# Altium PCB Brightside_Telemetry_pcb_rev2.PcbDoc (part 2 of 2)
Units mm, origin at the board's own origin, x right, y up, seen from the top; angles counter-clockwise.
Board outline 99.99 x 89.99 mm, 2 copper layers (Top Layer, Bottom Layer); 84 components, 55 nets, 357 pads, 109 vias.
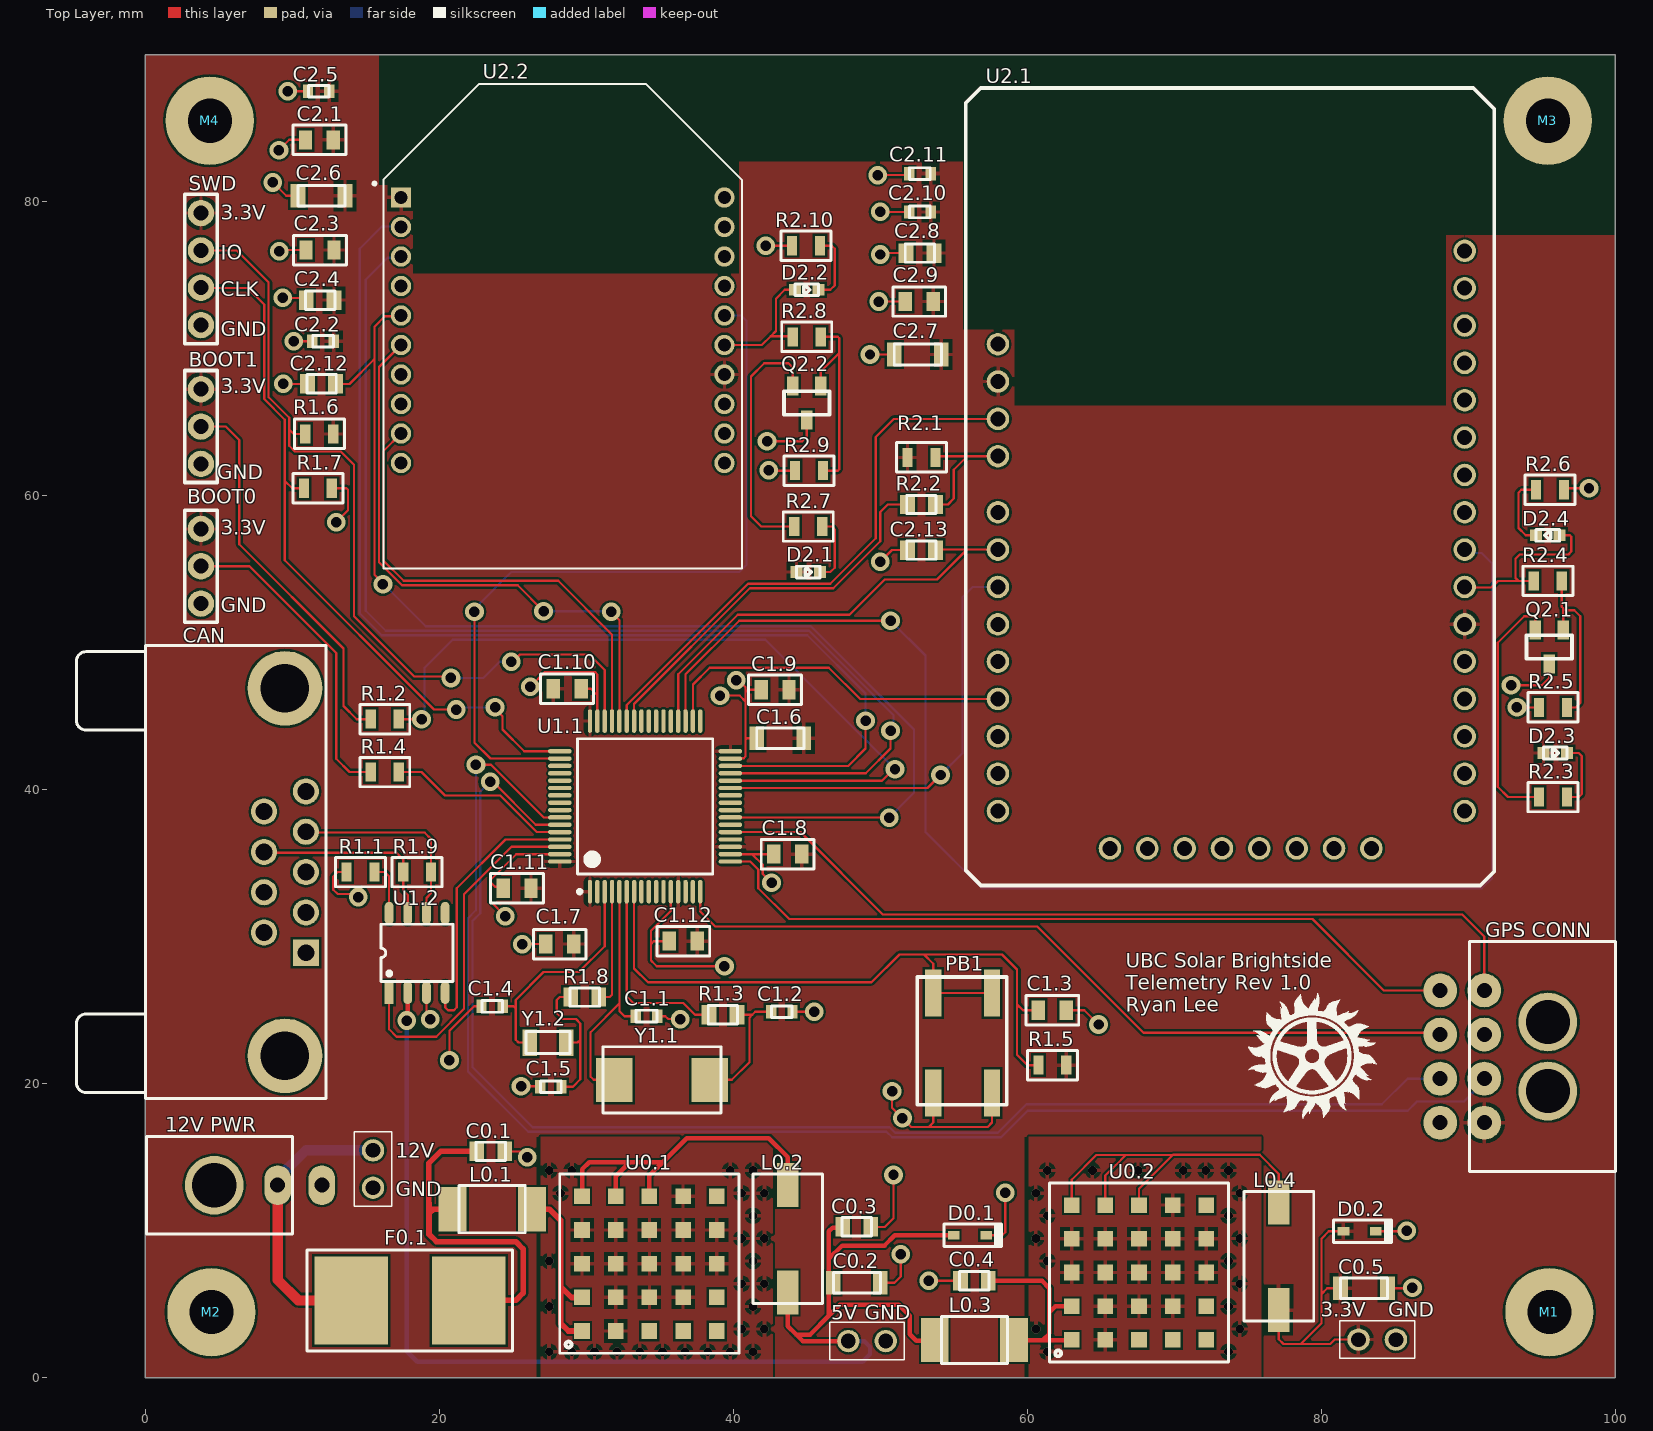
[diagram p0: Top Layer view]

## Part data (continued)
L0.1 L0.3: library part 742792510, "WURTH ELEKTRONIK - 742792510 - FERRITE BEAD, 70R, 6A, 1812", Case Code (Imperial)=1812, Case Code (Metric)=4532, Case/Package=SMD/SMT, Current Rating=6A, DC Resistance (DCR)=30mR, Manufacturer="Wurth Electronics", Max DC Current=3mA, Max Operating Temperature=125°C, Min Operating Temperature=-55°C, Package Quantity=1, Supplier Part Number 1=732-1640-1-ND, Test Frequency=100MHz, Tolerance=25%, Category="Ferrite Beads and Chips", ComponentLink1Description=https://datasheet.ciiva.com/1475/1695992-1475250.pdf?src-supplier=Farnell, ComponentLink1URL=https://datasheet.ciiva.com/1475/1695992-1475250.pdf?src-supplier=Farnell, ComponentLink2Description=https://datasheet.ciiva.com/11803/0900766b80bbd134-11803157.pdf?src-supplier=RSComponents, ComponentLink2URL=https://datasheet.ciiva.com/11803/0900766b80bbd134-11803157.pdf?src-supplier=RSComponents, ComponentLink3Description=https://datasheet.ciiva.com/23762/742792510-23762981.pdf?src-supplier=Newark, ComponentLink3URL=https://datasheet.ciiva.com/23762/742792510-23762981.pdf?src-supplier=Newark, ComponentLink4Description=https://datasheet.ciiva.com/4940/742792510-72179-4940456.pdf?src-supplier=Mouser, ComponentLink4URL=https://datasheet.ciiva.com/4940/742792510-72179-4940456.pdf?src-supplier=Mouser, ComponentLink5Description=https://datasheet.ciiva.com/1013/742792510-1013644.pdf?src-supplier=Digi-Key, ComponentLink5URL=https://datasheet.ciiva.com/1013/742792510-1013644.pdf?src-supplier=Digi-Key, ComponentLink6Description=https://datasheet.ciiva.com/1013/742792510-1013645.pdf?src-supplier=Digi-Key, ComponentLink6URL=https://datasheet.ciiva.com/1013/742792510-1013645.pdf?src-supplier=Digi-Key, ComponentLink7Description=https://datasheet.ciiva.com/1126/1695992-1126824.pdf?src-supplier=Element14, ComponentLink7URL=https://datasheet.ciiva.com/1126/1695992-1126824.pdf?src-supplier=Element14, ComponentLink8Description=https://datasheet.ciiva.com/1013/742792510-1013646.pdf?src-supplier=Digi-Key, ComponentLink8URL=https://datasheet.ciiva.com/1013/742792510-1013646.pdf?src-supplier=Digi-Key, Depth=3.2mm, Height=1.5mm, Impedance=70R, Lead Free="Lead Free", Length=4.5mm, Manufacturer Part Number=742792510, Material=Ferrite, Max Current Rating=6A, Mount="Surface Mount", Number of Lines=1, Packaging="Tape and Reel", REACH SVHC=Unknown, Resistance=30mR, RoHS=Yes, Stock 1=5974, Supplier 1=Digi-Key, Termination=SMD/SMT, Weight=0.003951oz, Width=3.2mm
L0.2 L0.4: library part 7427932, "Ferrite Bead 98 Ohm 2SMD 1LN", Case Code (Imperial)=1812, Case Code (Metric)=4532, Case/Package=SMD/SMT, DC Resistance (DCR)=0.9mR, Manufacturer="Wurth Electronics", Max Current Rating=6A, Max Operating Temperature=125°C, Min Operating Temperature=-55°C, Package Quantity=1, Supplier Part Number 1=732-2394-1-ND, Test Frequency=100MHz, Tolerance=25%, Category="Ferrite Beads and Chips", ComponentLink1Description=https://datasheet.ciiva.com/1014/7427932-1014097.pdf?src-supplier=Digi-Key, ComponentLink1URL=https://datasheet.ciiva.com/1014/7427932-1014097.pdf?src-supplier=Digi-Key, ComponentLink2Description=https://datasheet.ciiva.com/1466/1696119-1466626.pdf?src-supplier=Element14, ComponentLink2URL=https://datasheet.ciiva.com/1466/1696119-1466626.pdf?src-supplier=Element14, ComponentLink3Description=https://datasheet.ciiva.com/11796/0900766b80f886b0-11796146.pdf?src-supplier=RSComponents, ComponentLink3URL=https://datasheet.ciiva.com/11796/0900766b80f886b0-11796146.pdf?src-supplier=RSComponents, ComponentLink4Description=https://datasheet.ciiva.com/23763/7427932-23763047.pdf?src-supplier=Newark, ComponentLink4URL=https://datasheet.ciiva.com/23763/7427932-23763047.pdf?src-supplier=Newark, ComponentLink5Description=https://datasheet.ciiva.com/4939/7427932-72413-4939403.pdf?src-supplier=Mouser, ComponentLink5URL=https://datasheet.ciiva.com/4939/7427932-72413-4939403.pdf?src-supplier=Mouser, ComponentLink6Description=https://datasheet.ciiva.com/1014/7427932-1014098.pdf?src-supplier=Digi-Key, ComponentLink6URL=https://datasheet.ciiva.com/1014/7427932-1014098.pdf?src-supplier=Digi-Key, ComponentLink7Description=https://datasheet.ciiva.com/1014/7427932-1014099.pdf?src-supplier=Digi-Key, ComponentLink7URL=https://datasheet.ciiva.com/1014/7427932-1014099.pdf?src-supplier=Digi-Key, ComponentLink8Description=https://datasheet.ciiva.com/22711/1696119-22711445.pdf?src-supplier=Element14, ComponentLink8URL=https://datasheet.ciiva.com/22711/1696119-22711445.pdf?src-supplier=Element14, Depth=4.75mm, Height=3mm, Impedance=98R, Length=7.8mm, Manufacturer Part Number=7427932, Max DC Current=6A, Mount="Surface Mount", Number of Lines=1, Packaging="Tape and Reel", REACH SVHC=Unknown, RoHS=Yes, Shielding=Unshielded, Stock 1=698, Supplier 1=Digi-Key, Termination=SMD/SMT, Width=0.187inch
PB1: "SWITCH TACTILE SPST-NO 0.02A 15V", Case/Package=SMD/SMT, Color=White, Contact Current Rating=20mA, Contact Resistance=100mR, Manufacturer 1=Panasonic, Manufacturer Part Number 1=EVQ-Q2Y03W, Max Operating Temperature=85°C, Max Voltage Rating (DC)=15V, Min Operating Temperature=-40°C, Operating Force=3.5N, Package Quantity=1, Supplier Part Number 1=P12961SDKR-ND, Voltage Rating (AC)=250V, Actuator Length=1.3mm, Actuator Type=Standard, ComponentLink1Description=https://datasheet.ciiva.com/25603/0900766b810ad3e5-25603840.pdf?src-supplier=RSComponents, ComponentLink1URL=https://datasheet.ciiva.com/25603/0900766b810ad3e5-25603840.pdf?src-supplier=RSComponents, ComponentLink2Description=https://datasheet.ciiva.com/2901/atk0000ce28-2901284.pdf?src-supplier=Digi-Key, ComponentLink2URL=https://datasheet.ciiva.com/2901/atk0000ce28-2901284.pdf?src-supplier=Digi-Key, ComponentLink3Description=https://datasheet.ciiva.com/2901/atk0000ce28-2901285.pdf?src-supplier=Digi-Key, ComponentLink3URL=https://datasheet.ciiva.com/2901/atk0000ce28-2901285.pdf?src-supplier=Digi-Key, ComponentLink4Description=https://datasheet.ciiva.com/2901/atk0000ce28-2901286.pdf?src-supplier=Digi-Key, ComponentLink4URL=https://datasheet.ciiva.com/2901/atk0000ce28-2901286.pdf?src-supplier=Digi-Key, ComponentLink5Description=https://datasheet.ciiva.com/30127/8atk0000ce28-30127814.pdf?src-supplier=Onlinecomponents.com, ComponentLink5URL=https://datasheet.ciiva.com/30127/8atk0000ce28-30127814.pdf?src-supplier=Onlinecomponents.com, ComponentLink6Description=https://datasheet.ciiva.com/8165/atk0000ce28-8165191.pdf?src-supplier=Avnet, ComponentLink6URL=https://datasheet.ciiva.com/8165/atk0000ce28-8165191.pdf?src-supplier=Avnet, ComponentLink7Description=https://datasheet.ciiva.com/17099/70270561-17099386.pdf?src-supplier=Allied+Electronics, ComponentLink7URL=https://datasheet.ciiva.com/17099/70270561-17099386.pdf?src-supplier=Allied+Electronics, ComponentLink8Description=https://datasheet.ciiva.com/5685/28111-5685339.pdf?src-supplier=Farnell, ComponentLink8URL=https://datasheet.ciiva.com/5685/28111-5685339.pdf?src-supplier=Farnell, ComponentLink9Description=https://datasheet.ciiva.com/16438/atk0000ce28-16438079.pdf?src-supplier=Future+Electronics, ComponentLink9URL=https://datasheet.ciiva.com/16438/atk0000ce28-16438079.pdf?src-supplier=Future+Electronics, Current Rating=20mA, Depth=6.6mm, Electrical Life=100000Cycles, Height=3.1mm, Illumination Type=Non-Illuminated,Illuminated, Lead Free="Lead Free", Length=6mm, Max Current Rating=20mA, Mechanical Life=100000Cycles, Mount="Surface Mount", Number of Poles=1, Orientation=Straight, Packaging="Tape and Reel", Pricing 1="1=0.30000, 10=0.28600, 25=0.27520, 50=0.26520, 100=0.25490, 250=0.23452, 500=0.20394, 1000=0.17335 (USD)", Radiation Hardening=No, REACH SVHC=Unknown, RoHS=Yes, Stock 1=209620, Supplier 1=Digi-Key, Switch Function=Off-Mom, Switch Travel=0.25mm, Termination=SMD/SMT, Thickness=1.8mm, Throw Configuration=SPST, Voltage Rating (DC)=15V, Width=6mm
Q2.1 Q2.2: library part MMBT3904LT1G, "Transistor, Bipolar, Si, NPN, General Purpose, VCEO 40VDC, IC 200mA, PD 225mW, SOT-23", Case/Package=SOT-23-3, Collector Base Voltage (VCBO)=60V, Collector Emitter Breakdown Voltage=40V, Collector Emitter Saturation Voltage=300mV, Current Rating=200mA, Emitter Base Voltage (VEBO)=6V, Frequency=300MHz, Manufacturer="ON Semiconductor", Max Operating Temperature=150°C, Max Power Dissipation=300mW, Min Operating Temperature=-55°C, Package Quantity=1, Supplier Part Number 1=MMBT3904LT1GOSCT-ND, Category=BJTs, Collector Emitter Voltage (VCEO)=40V, ComponentLink1Description=https://datasheet.ciiva.com/16199/mmbt3904lt1-d-16199009.pdf?src-supplier=Future+Electronics, ComponentLink1URL=https://datasheet.ciiva.com/16199/mmbt3904lt1-d-16199009.pdf?src-supplier=Future+Electronics, ComponentLink2Description=https://datasheet.ciiva.com/4723/mmbt3904lt1-d-113169-4723050.pdf?src-supplier=Mouser, ComponentLink2URL=https://datasheet.ciiva.com/4723/mmbt3904lt1-d-113169-4723050.pdf?src-supplier=Mouser, ComponentLink3Description=https://datasheet.ciiva.com/15138/getdatasheetpartid-53263-15138779.pdf?src-supplier=Verical, ComponentLink3URL=https://datasheet.ciiva.com/15138/getdatasheetpartid-53263-15138779.pdf?src-supplier=Verical, ComponentLink4Description=https://datasheet.ciiva.com/11199/mmbt3904lt1-d-11199003.pdf?src-supplier=Avnet, ComponentLink4URL=https://datasheet.ciiva.com/11199/mmbt3904lt1-d-11199003.pdf?src-supplier=Avnet, ComponentLink5Description=https://datasheet.ciiva.com/976/mmbt3904lt1-d-976364.pdf?src-supplier=Digi-Key, ComponentLink5URL=https://datasheet.ciiva.com/976/mmbt3904lt1-d-976364.pdf?src-supplier=Digi-Key, ComponentLink6Description=https://datasheet.ciiva.com/14546/70099530-14546188.pdf?src-supplier=Allied+Electronics, ComponentLink6URL=https://datasheet.ciiva.com/14546/70099530-14546188.pdf?src-supplier=Allied+Electronics, ComponentLink7Description=https://datasheet.ciiva.com/7972/1708269-7972381.pdf?src-supplier=Element14, ComponentLink7URL=https://datasheet.ciiva.com/7972/1708269-7972381.pdf?src-supplier=Element14, ComponentLink8Description=https://datasheet.ciiva.com/22664/1708269-22664159.pdf?src-supplier=Element14, ComponentLink8URL=https://datasheet.ciiva.com/22664/1708269-22664159.pdf?src-supplier=Element14, ComponentLink9Description=https://datasheet.ciiva.com/976/mmbt3904lt1-d-976362.pdf?src-supplier=Digi-Key, ComponentLink9URL=https://datasheet.ciiva.com/976/mmbt3904lt1-d-976362.pdf?src-supplier=Digi-Key, ComponentLink10Description=https://datasheet.ciiva.com/16478/mmbt3904lt1-d-16478538.pdf?src-supplier=Avnet+Asia, ComponentLink10URL=https://datasheet.ciiva.com/16478/mmbt3904lt1-d-16478538.pdf?src-supplier=Avnet+Asia, ComponentLink11Description=https://datasheet.ciiva.com/976/mmbt3904lt1-d-976363.pdf?src-supplier=Digi-Key, ComponentLink11URL=https://datasheet.ciiva.com/976/mmbt3904lt1-d-976363.pdf?src-supplier=Digi-Key, Contact Plating=Tin,Matte, Element Configuration=Single, Gain Bandwidth Product=300MHz, Height=0.94mm, hFE Min=100, Lead Free="Lead Free", Length=2.9mm, Manufacturer Part Number=MMBT3904LT1G, Max Breakdown Voltage=40V, Max Collector Current=200mA, Max Frequency=300MHz, Number of Elements=1, Number of Pins=3, Packaging="Tape and Reel", Polarity=NPN, Power Dissipation=300mW, Pricing 1="1=0.12000, 10=0.11200, 25=0.10640, 100=0.04680, 250=0.04488, 500=0.03672, 1000=0.02550 (USD)", Radiation Hardening=No, REACH SVHC="No SVHC", RoHS=Yes, Stock 1=1679516, Supplier 1=Digi-Key, Transition Frequency=300MHz, Type="General Purpose", Voltage Rating (DC)=40V, Width=1.3mm
R1.1 R2.1 R2.6 R2.10: library part ERJ6ENF1001V, "RES SMD 1K OHM 1% 1/8W 0805", Case Code (Imperial)=0805, Case Code (Metric)=2012, Manufacturer=Panasonic, Max Operating Temperature=155°C, Max Power Dissipation=125mW, Min Operating Temperature=-55°C, Package Quantity=1, Resistance=1kR, Supplier Part Number 1=P1.00KCCT-ND, Temperature Coefficient=100ppm/°C, Tolerance=1%, Voltage Rating=150V, Case/Package=0805, Category=Resistors, ComponentLink1Description=https://datasheet.ciiva.com/34303/1988962-34303619.pdf?src-supplier=Jameco, ComponentLink1URL=https://datasheet.ciiva.com/34303/1988962-34303619.pdf?src-supplier=Jameco, ComponentLink2Description=https://datasheet.ciiva.com/11808/0900766b80f80784-11808500.pdf?src-supplier=RSComponents, ComponentLink2URL=https://datasheet.ciiva.com/11808/0900766b80f80784-11808500.pdf?src-supplier=RSComponents, ComponentLink3Description=https://datasheet.ciiva.com/28532/426256-28532134.pdf?src-supplier=Element14, ComponentLink3URL=https://datasheet.ciiva.com/28532/426256-28532134.pdf?src-supplier=Element14, ComponentLink4Description=https://datasheet.ciiva.com/30051/aoa0000ce2-30051974.pdf?src-supplier=Onlinecomponents.com, ComponentLink4URL=https://datasheet.ciiva.com/30051/aoa0000ce2-30051974.pdf?src-supplier=Onlinecomponents.com, ComponentLink5Description=https://datasheet.ciiva.com/16774/70260748-16774249.pdf?src-supplier=Allied+Electronics, ComponentLink5URL=https://datasheet.ciiva.com/16774/70260748-16774249.pdf?src-supplier=Allied+Electronics, ComponentLink6Description=https://datasheet.ciiva.com/46373/1678782-46373337.pdf?src-supplier=Element14, ComponentLink6URL=https://datasheet.ciiva.com/46373/1678782-46373337.pdf?src-supplier=Element14, ComponentLink7Description=https://datasheet.ciiva.com/46373/1678782-46373338.pdf?src-supplier=Element14, ComponentLink7URL=https://datasheet.ciiva.com/46373/1678782-46373338.pdf?src-supplier=Element14, ComponentLink8Description=https://datasheet.ciiva.com/48532/aoa0000ce2-48532156.pdf?src-supplier=Avnet, ComponentLink8URL=https://datasheet.ciiva.com/48532/aoa0000ce2-48532156.pdf?src-supplier=Avnet, ComponentLink9Description=https://datasheet.ciiva.com/7942/426256-7942429.pdf?src-supplier=Element14, ComponentLink9URL=https://datasheet.ciiva.com/7942/426256-7942429.pdf?src-supplier=Element14, ComponentLink10Description=https://datasheet.ciiva.com/16199/aoa0000ce2-16199262.pdf?src-supplier=Future+Electronics, ComponentLink10URL=https://datasheet.ciiva.com/16199/aoa0000ce2-16199262.pdf?src-supplier=Future+Electronics, ComponentLink11Description=https://datasheet.ciiva.com/9117/aoa0000ce2-9117391.pdf?src-supplier=Avnet, ComponentLink11URL=https://datasheet.ciiva.com/9117/aoa0000ce2-9117391.pdf?src-supplier=Avnet, ComponentLink12Description=https://datasheet.ciiva.com/16523/aoa0000ce2-16523855.pdf?src-supplier=Avnet+Asia, ComponentLink12URL=https://datasheet.ciiva.com/16523/aoa0000ce2-16523855.pdf?src-supplier=Avnet+Asia, Composition="Thick Film", Contact Plating=Tin, Depth=1.25mm, Features="Automotive AEC-Q200", Height=0.6mm, Lead Free="Lead Free", Length=2mm, Manufacturer Part Number=ERJ6ENF1001V, Military Standard=Not, Mount="Surface Mount", Number of Pins=2, Number of Terminations=2, Packaging="Tape and Reel", Power Rating=125mW, Pricing 1="1 = 0.100000, 10 = 0.081000, 100 = 0.031100, 1000 = 0.013670, 2500 = 0.011810 (USD)", Radiation Hardening=No, REACH SVHC="No SVHC", RoHS=Yes, Stock 1=946321, Supplier 1=Digi-Key, Termination=SMD/SMT, Voltage Rating (DC)=150V, Width=0.049inch
R1.2 R1.4 R1.5 R1.6 R1.7 R2.4 R2.5 R2.8 R2.9: library part ERJ6ENF1002V, "RES SMD 10K OHM 1% 1/8W 0805", Case/Package=0805, Manufacturer=Yageo, Manufacturer Part Number=ERJ-6ENF1002V, Max Operating Temperature=155°C, Min Operating Temperature=-55°C, Power Rating=125mW, Resistance=10000R, Supplier Part Number 1=P10.0KCCT-ND, Temperature Coefficient=100ppm/°C, Tolerance=1%, Voltage Rating (DC)=150V, Category=Resistors, ComponentLink1Description=https://datasheet.ciiva.com/27056/2078477-27056611.pdf?src-supplier=Jameco, ComponentLink1URL=https://datasheet.ciiva.com/27056/2078477-27056611.pdf?src-supplier=Jameco, Depth=1.25mm, Height=0.5mm, Lead Free="Lead Free", Length=2mm, Mount="Surface Mount", Number of Pins=2, Packaging="Tape and Reel", Pricing 1="1 = 0.100000, 10 = 0.081000, 100 = 0.031100, 1000 = 0.013670, 2500 = 0.011810 (USD)", REACH SVHC="No SVHC", RoHS=No, Stock 1=3342401, Supplier 1=Digi-Key, Width=1.25mm
R1.3 R1.8 R2.2: library part RMCF0805ZT0R00, "STACKPOLE ELECTRONICS - RMCF0805ZT0R00. - RES THKFLM 0805 0 OHM JUMPER 1/8W 200PPM/ C SMD ROHS COMPLIANT: YES", Case Code (Imperial)=0805, Case Code (Metric)=2012, Manufacturer="Stackpole Electronics", Max Operating Temperature=155°C, Max Power Dissipation=125mW, Min Operating Temperature=-55°C, Resistance=0mR, Supplier Part Number 1=RMCF0805ZT0R00CT-ND, Case/Package=0805, Category="Chip SMD Resistors", ComponentLink1Description=https://datasheet.ciiva.com/15193/getdatasheetpartid-360417-15193658.pdf?src-supplier=Verical, ComponentLink1URL=https://datasheet.ciiva.com/15193/getdatasheetpartid-360417-15193658.pdf?src-supplier=Verical, Composition="Thick Film", Contact Plating=Tin,Matte, Depth=1.25mm, Features="Automotive AEC-Q200", Height=0.026inch, Lead Free="Lead Free", Length=2mm, Manufacturer Part Number=RMCF0805ZT0R00, Military Standard=Not, Mount="Surface Mount", Number of Terminations=2, Packaging="Tape and Reel", Power Rating=125mW, Radiation Hardening=No, RoHS=Yes, Stock 1=14305, Supplier 1=Digi-Key, Width=0.049inch
R1.9: library part ERJ6ENV1200V, "RES SMD 120 OHM 1% 1/8W 0805", Supplier Part Number 1=P120CCT-ND, ComponentLink1Description=https://datasheet.ciiva.com/11821/0900766b80f80784-11821533.pdf?src-supplier=RSComponents, ComponentLink1URL=https://datasheet.ciiva.com/11821/0900766b80f80784-11821533.pdf?src-supplier=RSComponents, Supplier 1=Digi-Key
R2.3 R2.7: library part ERJ6ENF4640V, "RES SMD 464 OHM 1% 1/8W 0805", Supplier Part Number 1=P464CCT-ND, Supplier 1=Digi-Key
SWD: library part "0.1\" Header 4pos"
U0.1: "DC-DC Converter; SMD; reg; Single Output; 3A; 5V Out; RPM-3.0 Series", Manufacturer=Recom, Supplier Part Number 1=945-3254-1-ND, Category="Voltage Regulators - Switching", ComponentLink1Description=http://www.farnell.com/datasheets/2787803.pdf?src-supplier=Farnell, ComponentLink1URL=http://www.farnell.com/datasheets/2787803.pdf?src-supplier=Farnell, ComponentLink2Description=https://www.recom-power.com/pdf/Innoline/RPM-3.0.pdf?src-supplier=Digi-Key, ComponentLink2URL=https://www.recom-power.com/pdf/Innoline/RPM-3.0.pdf?src-supplier=Digi-Key, Manufacturer Part Number=RPM5.0-3.0, Pricing 1="1=4.26000 (USD)", RoHS=No, Stock 1=929, Supplier 1=Digi-Key
U0.2: "RPM-3.0 Series 3 to 17 V Input 3.3 V Output 3 A Non Isolated DC/DC Converter", Manufacturer=Recom, Supplier Part Number 1=945-3253-1-ND, Category="Voltage Regulators - Switching", ComponentLink1Description=https://www.recom-power.com/pdf/Innoline/RPM-3.0.pdf?src-supplier=Digi-Key, ComponentLink1URL=https://www.recom-power.com/pdf/Innoline/RPM-3.0.pdf?src-supplier=Digi-Key, Manufacturer Part Number=RPM3.3-3.0, Pricing 1="1=4.26000 (USD)", RoHS=No, Stock 1=287, Supplier 1=Digi-Key
U1.1: "ARM® Cortex®-M3 STM32F1 Microcontroller IC 32-Bit 72MHz 256KB (256K x 8) FLASH", Supplier Part Number 1=497-8920-ND, Supplier 1=Digi-Key
U1.2: "CAN TRANSCEIVER", Case/Package=MSOP, Color=Black, Contact Resistance=10mR, Current Rating=5A, ESR (Equivalent Series Resistance)=140R, Flammability Rating="UL94 V-0", Frequency=1MHz, Frequency Stability=30ppm, Frequency Tolerance=20ppm, Insulation Resistance=1GR, Load Capacitance=18pF, Manufacturer=Microchip, Max Frequency=400kHz, Max Operating Temperature=100°C, Max Supply Voltage=5.5V, Min Operating Temperature=-50°C, Min Supply Voltage=2.7V, Nominal Supply Current=2.5mA, Operating Supply Voltage=5V, Package Quantity=80, Series Resistance=500R, Supplier Part Number 1=MCP2551-I/SN-ND, Supplier Part Number 10=535-9544-1-ND, Voltage Rating=125V, Voltage Rating (AC)=250V, Access Time=900ns, Body Material=Steel, Category="Interface ICs", ComponentLink1Description=https://datasheet.ciiva.com/8084/jp011797-8084592.pdf?src-supplier=Avnet, ComponentLink1URL=https://datasheet.ciiva.com/8084/jp011797-8084592.pdf?src-supplier=Avnet, ComponentLink2Description=https://datasheet.ciiva.com/27056/2040583-27056423.pdf?src-supplier=Jameco, ComponentLink2URL=https://datasheet.ciiva.com/27056/2040583-27056423.pdf?src-supplier=Jameco, ComponentLink3Description=https://datasheet.ciiva.com/1495/21667f-1495089.pdf?src-supplier=Element14, ComponentLink3URL=https://datasheet.ciiva.com/1495/21667f-1495089.pdf?src-supplier=Element14, ComponentLink4Description=https://datasheet.ciiva.com/1700/21667f-1700023.pdf?src-supplier=Digi-Key, ComponentLink4URL=https://datasheet.ciiva.com/1700/21667f-1700023.pdf?src-supplier=Digi-Key, ComponentLink5Description=https://datasheet.ciiva.com/14152/eb644223-644224-e-14152540.pdf?src-supplier=Distrelec, ComponentLink5URL=https://datasheet.ciiva.com/14152/eb644223-644224-e-14152540.pdf?src-supplier=Distrelec, ComponentLink6Description=https://datasheet.ciiva.com/17649/jp011797-17649039.pdf?src-supplier=Avnet+Europe, ComponentLink6URL=https://datasheet.ciiva.com/17649/jp011797-17649039.pdf?src-supplier=Avnet+Europe, ComponentLink7Description=https://datasheet.ciiva.com/655/171-yyy-113ryy1-655574.pdf?src-supplier=Digi-Key, ComponentLink7URL=https://datasheet.ciiva.com/655/171-yyy-113ryy1-655574.pdf?src-supplier=Digi-Key, ComponentLink8Description=https://datasheet.ciiva.com/5118/171-yyy-113ryy1-5118968.pdf?src-supplier=Mouser, ComponentLink8URL=https://datasheet.ciiva.com/5118/171-yyy-113ryy1-5118968.pdf?src-supplier=Mouser, ComponentLink9Description=https://datasheet.ciiva.com/16376/171-yyy-113ryy1-16376504.pdf?src-supplier=Future+Electronics, ComponentLink9URL=https://datasheet.ciiva.com/16376/171-yyy-113ryy1-16376504.pdf?src-supplier=Future+Electronics, ComponentLink10Description=https://datasheet.ciiva.com/12669/6180xx231121-12669218.pdf?src-supplier=Mouser, ComponentLink10URL=https://datasheet.ciiva.com/12669/6180xx231121-12669218.pdf?src-supplier=Mouser, ComponentLink11Description=https://datasheet.ciiva.com/1426/1442189-1426428.pdf?src-supplier=Element14, ComponentLink11URL=https://datasheet.ciiva.com/1426/1442189-1426428.pdf?src-supplier=Element14, ComponentLink12Description=https://datasheet.ciiva.com/12669/6180xx231221-12669204.pdf?src-supplier=Mouser, ComponentLink12URL=https://datasheet.ciiva.com/12669/6180xx231221-12669204.pdf?src-supplier=Mouser, ComponentLink13Description=https://datasheet.ciiva.com/25605/0900766b81191766-25605476.pdf?src-supplier=RSComponents, ComponentLink13URL=https://datasheet.ciiva.com/25605/0900766b81191766-25605476.pdf?src-supplier=RSComponents, ComponentLink14Description=https://datasheet.ciiva.com/1426/1442191-1426429.pdf?src-supplier=Element14, ComponentLink14URL=https://datasheet.ciiva.com/1426/1442191-1426429.pdf?src-supplier=Element14, ComponentLink15Description=https://datasheet.ciiva.com/22649/1730562-22649446.pdf?src-supplier=Element14, ComponentLink15URL=https://datasheet.ciiva.com/22649/1730562-22649446.pdf?src-supplier=Element14, ComponentLink16Description=https://datasheet.ciiva.com/22767/1730562-22767677.pdf?src-supplier=Farnell, ComponentLink16URL=https://datasheet.ciiva.com/22767/1730562-22767677.pdf?src-supplier=Farnell, ComponentLink17Description=https://datasheet.ciiva.com/15123/getdatasheetpartid-309492-15123357.pdf?src-supplier=Verical, ComponentLink17URL=https://datasheet.ciiva.com/15123/getdatasheetpartid-309492-15123357.pdf?src-supplier=Verical, ComponentLink18Description=https://datasheet.ciiva.com/41455/001185584-da-01-en-ic-eepr-256kbi-m24256-brmn6tp-soic-8-stm-41455201.pdf?src-supplier=Conrad, ComponentLink18URL=https://datasheet.ciiva.com/41455/001185584-da-01-en-ic-eepr-256kbi-m24256-brmn6tp-soic-8-stm-41455201.pdf?src-supplier=Conrad, ComponentLink19Description=https://datasheet.ciiva.com/1905/cd00001891-1905179.pdf?src-supplier=Digi-Key, ComponentLink19URL=https://datasheet.ciiva.com/1905/cd00001891-1905179.pdf?src-supplier=Digi-Key, ComponentLink20Description=https://datasheet.ciiva.com/1905/cd00001891-1905180.pdf?src-supplier=Digi-Key, ComponentLink20URL=https://datasheet.ciiva.com/1905/cd00001891-1905180.pdf?src-supplier=Digi-Key, ComponentLink21Description=https://datasheet.ciiva.com/1905/cd00001891-1905181.pdf?src-supplier=Digi-Key, ComponentLink21URL=https://datasheet.ciiva.com/1905/cd00001891-1905181.pdf?src-supplier=Digi-Key, ComponentLink22Description=https://datasheet.ciiva.com/14155/04402066-14155224.pdf?src-supplier=Distrelec, ComponentLink22URL=https://datasheet.ciiva.com/14155/04402066-14155224.pdf?src-supplier=Distrelec, ComponentLink23Description=https://datasheet.ciiva.com/5158/0436500200-pcb-headers-148844-5158523.pdf?src-supplier=Mouser, ComponentLink23URL=https://datasheet.ciiva.com/5158/0436500200-pcb-headers-148844-5158523.pdf?src-supplier=Mouser, ComponentLink24Description=https://datasheet.ciiva.com/11748/0900766b80d6135b-11748140.pdf?src-supplier=RSComponents, ComponentLink24URL=https://datasheet.ciiva.com/11748/0900766b80d6135b-11748140.pdf?src-supplier=RSComponents, ComponentLink25Description=https://datasheet.ciiva.com/22683/1709823-22683551.pdf?src-supplier=Element14, ComponentLink25URL=https://datasheet.ciiva.com/22683/1709823-22683551.pdf?src-supplier=Element14, ComponentLink26Description=https://datasheet.ciiva.com/30161/48630436500200-pcb-headers-30161343.pdf?src-supplier=Onlinecomponents.com, ComponentLink26URL=https://datasheet.ciiva.com/30161/48630436500200-pcb-headers-30161343.pdf?src-supplier=Onlinecomponents.com, ComponentLink27Description=https://datasheet.ciiva.com/9432/0436500200-pcb-headers-9432849.pdf?src-supplier=Avnet, ComponentLink27URL=https://datasheet.ciiva.com/9432/0436500200-pcb-headers-9432849.pdf?src-supplier=Avnet, ComponentLink28Description=https://datasheet.ciiva.com/16089/1029720436500200-pcb-headers-16089218.pdf?src-supplier=Onlinecomponents.com, ComponentLink28URL=https://datasheet.ciiva.com/16089/1029720436500200-pcb-headers-16089218.pdf?src-supplier=Onlinecomponents.com, ComponentLink29Description=https://datasheet.ciiva.com/7920/1839562-7920756.pdf?src-supplier=Element14, ComponentLink29URL=https://datasheet.ciiva.com/7920/1839562-7920756.pdf?src-supplier=Element14, ComponentLink30Description=https://datasheet.ciiva.com/19462/884053-19462312.pdf?src-supplier=Jameco, ComponentLink30URL=https://datasheet.ciiva.com/19462/884053-19462312.pdf?src-supplier=Jameco, ComponentLink31Description=https://datasheet.ciiva.com/16654/0436500200-pcb-headers-16654958.pdf?src-supplier=Avnet+Europe, ComponentLink31URL=https://datasheet.ciiva.com/16654/0436500200-pcb-headers-16654958.pdf?src-supplier=Avnet+Europe, ComponentLink32Description=https://datasheet.ciiva.com/6904/3020-34-0300-00-6904731.pdf?src-supplier=Digi-Key, ComponentLink32URL=https://datasheet.ciiva.com/6904/3020-34-0300-00-6904731.pdf?src-supplier=Digi-Key, ComponentLink33Description=https://datasheet.ciiva.com/18485/3020-xx-0300-00-18485471.pdf?src-supplier=Digi-Key, ComponentLink33URL=https://datasheet.ciiva.com/18485/3020-xx-0300-00-18485471.pdf?src-supplier=Digi-Key, ComponentLink34Description=https://datasheet.ciiva.com/862/abm3-862465.pdf?src-supplier=Digi-Key, ComponentLink34URL=https://datasheet.ciiva.com/862/abm3-862465.pdf?src-supplier=Digi-Key, ComponentLink35Description=https://datasheet.ciiva.com/855/abs07-855948.pdf?src-supplier=Digi-Key, ComponentLink35URL=https://datasheet.ciiva.com/855/abs07-855948.pdf?src-supplier=Digi-Key, Composition=Ceramic, Connector Type=D-Sub,Plug,Signal, Contact Material=Brass, Contact Plating=Gold, Density=256Kb, Depth=18.5mm, Gender=Male, Glow Wire Compliant=Compliant, Halogen Free="Low Halogen", Height=9.93mm, Housing Color=Black, Housing Material=Nylon, Interface=SPI, Lead Free="Lead Free", Length=30.8mm, Manufacturer Part Number=MCP2551-I/SN, Material=Metal, Memory Size=256Kb, Memory Type=EEPROM, Mount="Through Hole", Number of Circuits=2, Number of Contacts=9, Number of Pins=16, Number of Positions=9, Number of Rows=2, Orientation="Right Angle", Packaging=Tray, Pitch=2.84mm, Radiation Hardening=No, REACH SVHC="No SVHC", RoHS=Yes, Row Spacing=0.1inch, Stock 1=3363, Stock 2=10320, Stock 3=281, Stock 4=49, Stock 5=4671, Stock 6=4627, Stock 7=11258, Stock 8=21730, Stock 9=68218, Stock 10=100673, Supplier 1=Digi-Key, Supplier 2=Digi-Key, Supplier 3=Digi-Key, Supplier 4=Digi-Key, Supplier 5=Digi-Key, Supplier 6=Digi-Key, Supplier 7=Digi-Key, Supplier 8=Digi-Key, Supplier 9=Digi-Key, Supplier 10=Digi-Key, Supplier Part Number 2=9209ME-ND, Supplier Part Number 3=732-618009231121-ND, Supplier Part Number 4=732-618009231221-ND, Supplier Part Number 5=LTC6820IMS#PBF-ND, Supplier Part Number 6=497-6348-1-ND, Supplier Part Number 7=WM1860-ND, Supplier Part Number 8=1175-1623-ND, Supplier Part Number 9=535-10630-1-ND, Termination="Through Hole", Tolerance=20ppm, Voltage Rating (DC)=250V, Width=12.6mm, Working Voltage=250V
U2.2: "Rf Transceiver Module, 2.4GHZ, -101DBM", Case/Package=Module, Current - Receiving=31mA, Current - Transmitting=120mA, Frequency=2.4GHz, Manufacturer="Digi International", Max Operating Temperature=85°C, Min Operating Temperature=-40°C, Supplier Part Number 1=602-1897-ND, Category="RF Receivers, Transceivers", ComponentLink1Description=https://www.digi.com/resources/documentation/digidocs/pdfs/90001500.pdf?src-supplier=Digi-Key, ComponentLink1URL=https://www.digi.com/resources/documentation/digidocs/pdfs/90001500.pdf?src-supplier=Digi-Key, Data Rate=1Mbps, Interface=SPI,UART, Manufacturer Part Number=XBP24CAUIT-001, Mount="Through Hole", Packaging=Tray, Pricing 1="1=32.56000 (USD)", RoHS=No, Sensitivity=-101dBm, Stock 1=500, Supplier 1=Digi-Key
Y1.1: library part NX8045GB-8.000000MHZ, "CRYSTAL 8.0000MHZ 8PF SMD", Case/Package=SMD/SMT, ESR (Equivalent Series Resistance)=200R, Frequency Stability=50ppm, Load Capacitance=8pF, Manufacturer=NDK, Max Operating Temperature=70°C, Min Operating Temperature=-10°C, Package Quantity=1000, Supplier Part Number 1=644-1018-1-ND, Category=Crystals, ComponentLink1Description=https://datasheet.ciiva.com/856/nx8045gb-856752.pdf?src-supplier=Digi-Key, ComponentLink1URL=https://datasheet.ciiva.com/856/nx8045gb-856752.pdf?src-supplier=Digi-Key, ComponentLink2Description=https://datasheet.ciiva.com/856/nx8045gb-856753.pdf?src-supplier=Digi-Key, ComponentLink2URL=https://datasheet.ciiva.com/856/nx8045gb-856753.pdf?src-supplier=Digi-Key, ComponentLink3Description=https://datasheet.ciiva.com/856/nx8045gb-856754.pdf?src-supplier=Digi-Key, ComponentLink3URL=https://datasheet.ciiva.com/856/nx8045gb-856754.pdf?src-supplier=Digi-Key, Frequency=8MHz, Frequency Tolerance=50ppm, Height=0.079inch, Lead Free=Exempt, Length=0.315inch, Manufacturer Part Number=NX8045GB-8.000000MHZ, Mount="Surface Mount", Number of Pins=2, Packaging="Tape and Reel", RoHS=Yes, Stock 1=116457, Supplier 1=Digi-Key, Width=0.177inch
Y1.2: library part FC-13532.7680KA-AG0, "Crystals 32.768KHz 20ppm 7.0pF -40C +85C", Capacitance=7E-12F, ESR (Equivalent Series Resistance)=65kR, Frequency=32.768kHz, Frequency Stability=20ppm, Load Capacitance=7pF, Manufacturer=Epson, Max Operating Temperature=85°C, Min Operating Temperature=-40°C, Package Quantity=1000, Supplier Part Number 1=732-FC135-32.76KAAG0, Category=Uncategorized, ComponentLink1Description=http://www.mouser.com/ds/2/137/1699449-465441.pdf?src-supplier=Mouser, ComponentLink1URL=http://www.mouser.com/ds/2/137/1699449-465441.pdf?src-supplier=Mouser, Height=0.8mm, Length=3.2mm, Manufacturer Part Number=FC-13532.7680KA-AG0, Packaging="Tape and Reel", RoHS=No, Supplier 1=Mouser, Termination=SMD/SMT, Tolerance=20ppm, Weight=0.000564oz, Width=1.5mm
U2.1: DeviceSetName=XBEE_SMD_ADAPTER, GateName_1=G$1, LibraryName=UBCSolar, Package=XBEE_SMD_ADAPTER, SymbolName_1=XBEE_SMD_ADAPTER

## Via types
v1: diameter 1.27, hole 0.711, Top Layer to Bottom Layer, 61 vias
v2: diameter 0.6, hole 0.6, Top Layer to Bottom Layer, 48 vias

## Nets (pads, with @x,y where several pads share a name; then routed paths per layer and width w, separated by ;. In a path a pad name is that pad's centre, name@x,y a point inside that pad or via, vN(x,y) a via of type N, cw(c..) or ccw(c..) an arc to the next point about the centre after c; other vN are vias at no path point)
3.3V: "GPS CONN.4" BOOT0.1 BOOT1.1 C0.5.2 C1.6.1 C1.7.2 C1.8.2 C1.9.2 C1.10.2 C1.11.2 C1.12.2 C2.1.2 C2.2.2 C2.3.2 C2.4.2 C2.5.1 C2.6.2 C2.7.2 C2.8.1 C2.9.2 C2.10.2 C2.11.2 D0.2.2 D2.1.2 D2.3.2 J0.3.1 L0.4.2 R1.5.2 R1.6.1 R2.1.2 SWD.4 U1.1.1 U1.1.13 U1.1.19 U1.1.32 U1.1.48 U1.1.64 U2.1.2 U2.1.27 U2.2.1 U2.2.14 | length 18.6
  Top Layer w0.152: L0.4.2 77.1,2.617 77.417,2.3 78.594,2.3 ; C0.5.2 80.394,6.1 80,5.706 ; D0.2.2 80.5,9.967 80,9.467 80,5.706 ; J0.3.1 80.894,2.6 80.594,2.3 78.594,2.3 ; 78.594,2.3 80,3.706 80,5.706
5V: C0.2.2 C0.3.2 D0.1.2 J0.2.1 L0.2.2 L0.3.1 U1.2.2 | length 93.4
  Top Layer w0.304: v1(17.794,24.3) 17.859,24.365 U1.2.2 ; L0.2.2 43.7,3.517 44.275,2.942 ; C0.3.2 47.4,10.217 46.75,10.217 46.5,9.967 46.5,8.092 ; J0.2.1 44.717,2.5 44.275,2.942 ; L0.3.1 53.656,2.523 52.444,2.523 52,2.967 52,4.217 51.25,4.967 47.25,4.967 46.5,4.217 ; D0.1.2 50.983,9.7 50.283,9 47.408,9 46.5,8.092 ; 44.275,2.942 45.225,2.942 46.5,4.217 ; 46.5,4.217 46.5,8.092
  Bottom Layer w0.304: v1(17.794,24.3) 17.794,1.8 18.494,1.1 48.794,1.1 49.294,1.6 49.294,2.1 48.894,2.5 J0.2.1
12V: "12V PWR.1" F0.1.1 J0.1.1 | length 19.8
  Top Layer w0.7: 9.014,13.1 9.014,6.653 10.4,5.267 F0.1.1
  Bottom Layer w0.7: 9.014,13.1 8.994,13.12 8.994,13.7 9.164,13.7 10.934,15.47 J0.1.1
BJT1: D2.4.2 R2.4.1 U2.1.28 | length 12.3
  Top Layer w0.152: U2.1.28@89.754,53.8 U2.1.28 89.784,53.75 91.55,53.75 92,54.2 93.394,54.2 ; R2.4.1 93.394,54.2 ; D2.4.2 96.894,57.3 96.994,57.2 96.994,56.2 96.794,56 93.494,56 93.194,55.7 93.194,54.4 93.394,54.2
Boot0: BOOT0.2 R1.4.2 | length 21.6
  Top Layer w0.152: BOOT0.2 7.094,55.2 12.994,49.3 12.994,42.1 13.894,41.2 R1.4.2
Boot1: BOOT1.2 R1.2.2 | length 26.2
  Top Layer w0.152: BOOT1.2 5.479,64.7 6.394,63.785 6.394,56.7 13.494,49.6 13.494,45.7 14.394,44.8 R1.2.2
CAN_RX: U1.1.61 U1.2.4 | length 18.4
  Top Layer w0.152: U1.2.4 20.399,25.195 20.594,25 20.994,25 21.194,25.2 21.194,33.3 24.512,36.617 U1.1.61
CAN_TX: U1.1.62 U1.2.1 | length 24.2
  Top Layer w0.152: U1.2.1 16.589,23.705 17.094,23.2 19.794,23.2 21.69,25.095 21.69,32.895 24.912,36.117 U1.1.62
CANH: CAN.8 R1.9.2 U1.2.7 | length 13.4
  Top Layer w0.152: CAN.8@8.094,35.71 17.084,35.71 17.544,35.25 R1.9.2 17.544,33.15 17.859,32.835 U1.2.7
CANL: CAN.4 R1.9.1 U1.2.6 | length 13.9
  Top Layer w0.152: CAN.4@10.939,37.082 19.013,37.082 19.444,36.65 R1.9.1 19.444,32.95 19.129,32.635 U1.2.6
  Top Layer w0.304: CAN.4@10.939,37.115 CAN.4@10.957,37.133
GND: "12V PWR.2" "GPS CONN.2" "GPS CONN.8" BOOT0.3 BOOT1.3 C0.1.1 C0.2.1 C0.3.1 C0.4.1 C0.5.1 C1.1.2 C1.2.2 C1.3.1 C1.4.1 C1.5.1 C1.6.2 C1.7.1 C1.8.1 C1.9.1 C1.10.1 C1.11.1 C1.12.1 C2.1.1 C2.2.1 C2.3.1 C2.4.1 C2.5.2 C2.6.1 C2.7.1 C2.8.2 C2.9.1 C2.10.1 C2.11.1 C2.12.2 C2.13.1 CAN.6 CAN.9 D0.1.1 D0.2.1 J0.1.2 J0.2.2 J0.3.2 PB1.2 PB1.4 Q2.1.3 Q2.2.3 R1.1.2 R1.7.1 R2.5.1 R2.6.1 R2.9.1 R2.10.1 SWD.1 U0.1.A3 U0.1.A4 U0.1.B1 U0.1.B2 U0.1.B3 U0.1.B4 U0.1.C2 U0.1.C3 U0.1.C4 U0.1.D2 U0.1.D3 U0.1.D4 U0.1.D5 U0.1.E3 U0.1.E4 U0.2.A3 U0.2.A4 U0.2.B1 U0.2.B2 U0.2.B3 U0.2.B4 U0.2.C2 U0.2.C3 U0.2.C4 U0.2.D2 U0.2.D3 U0.2.D4 U0.2.D5 U0.2.E3 U0.2.E4 U1.1.12 U1.1.18 U1.1.31 U1.1.47 U1.1.63 U1.2.3 U2.1.1 U2.1.11 U2.1.13 U2.1.22 U2.1.35 U2.2.10 | length 140.4
  Top Layer w0.152: v1(8.669,81.3) 8.694,81.3 9.594,80.4 C2.6.1 ; v1(9.094,83.5) 9.794,84.2 C2.1.1 ; v1(9.119,76.625) 9.194,76.7 C2.3.1 ; v1(9.344,73.45) 10.794,73.45 C2.4.1 ; v1(9.394,67.6) 10.844,67.6 10.944,67.5 C2.12.2 ; v1(9.694,87.5) C2.5.2 ; v1(10.094,70.5) C2.2.1 ; R1.7.1 13.694,60.5 13.794,60.4 13.794,59 v1(12.994,58.2) ; R1.1.2 13.094,34.4 12.794,34.1 12.794,33.2 13.094,32.9 14.294,32.9 v1(14.494,32.7) ; U1.2.3 19.129,24.665 v1(19.394,24.4) ; v1(20.694,21.6) 20.694,23.6 22.362,25.267 C1.4.1 C1.4.1@22.851,25.291 ; C1.11.1 24.244,33.4 23.794,33.4 23.494,33.7 ; C0.1.1 25.494,15.4 25.894,15 v1(25.994,15) ; v1(24.494,31.4) 23.494,32.4 23.494,33.7 ; v1(25.564,19.833) 26.75,19.833 26.793,19.876 C1.5.1 ; v1(25.644,29.5) C1.7.1 ; v1(26.194,47) 27.194,48 30.594,48 30.75,47.844 30.75,46.417 ; U1.1.63 25.238,35.617 23.494,33.873 23.494,33.7 ; C1.10.1 30.3,46.867 30.75,46.417 ; U1.1.47 30.75,46.417 ; C1.1.2 35.375,24.6 35.575,24.4 v1(36.394,24.4) ; C1.12.1 34.594,29.7 34.394,29.5 ; U1.1.12 35.75,31.756 34.394,30.4 34.394,29.5 ; v1(39.094,46.4) 40.429,46.4 40.829,46 ; v1(39.394,28) 34.794,28 34.494,28.3 34.484,28.3 34.394,28.389 34.394,29.5 ; U1.1.18 41.275,35.617 ; U1.1.31 39.828,42.145 40.705,42.145 40.829,42.269 40.829,43.411 ; v1(40.194,47.436) 40.358,47.436 40.829,46.966 40.829,46.634 ; C1.6.2 40.918,43.5 40.829,43.411 ; C1.9.1 40.994,46.8 40.829,46.634 ; v1(42.194,77) R2.10.1 ; v1(42.294,63.7) 44.694,63.7 44.994,64 Q2.2.3 ; v1(42.4,61.717) 42.417,61.7 R2.9.1 ; v1(42.6,33.667) 42,34.267 42,34.892 41.275,35.617 ; C1.8.1 41.275,35.617 ; C1.2.2 v1(45.494,24.9) ; v1(49.294,69.6) C2.7.1 ; C0.3.1 50.3,10.267 50.894,10.862 v1(50.894,13.8) ; v1(49.819,81.8) 51.869,81.8 C2.11.1 ; v1(49.894,73.2) C2.9.1 ; v1(49.994,55.5) 50.794,56.3 C2.13.1 ; v1(49.994,76.4) 50.094,76.5 C2.8.2 ; v1(49.994,79.3) C2.10.1 ; C0.2.1 50.962,6.467 51.394,6.9 v1(51.394,8.4) ; v1(50.794,19.5) 50.794,18.373 v1(51.5,17.667) 52.1,17.067 53.3,17.067 ; v1(53.294,6.6) C0.4.1 ; PB1.2 53.6,17.367 53.3,17.067 ; D0.1.1 58.294,9.7 58.494,9.9 v1(58.494,12.6) ; PB1.4 57.6,17.367 57.3,17.067 53.3,17.067 ; C1.3.1 63.872,25 v1(64.839,24.033) ; D0.2.1 85.762,9.967 v1(85.794,10) ; C0.5.1 86.156,6.1 v1(86.189,6.133) ; v1(92.894,47.1) 94.994,47.1 95.494,47.6 Q2.1.3 ; v1(93.294,45.6) R2.5.1 ; R2.6.1 96.594,60.3 96.794,60.5 v1(98.194,60.5) ; 40.829,43.411 40.829,46 ; 40.829,46 40.829,46.634
  other v2: 27.474,1.78 29.014,1.78 30.554,1.78 32.094,1.78 33.634,1.78 35.174,1.78 36.714,1.78 38.254,1.78 39.794,1.78 41.334,1.78 61.354,1.78 73.674,1.78 40.564,3.32 42.104,3.32 60.584,3.32 74.444,3.32 27.474,4.86 41.334,4.86 73.674,4.86 40.564,6.4 42.104,6.4 74.444,6.4 27.474,7.94 41.334,7.94 61.354,7.94 73.674,7.94 40.564,9.48 42.104,9.48 60.584,9.48 74.444,9.48 41.334,11.02 61.354,11.02 73.674,11.02 28.244,12.56 40.564,12.56 42.104,12.56 60.584,12.56 74.444,12.56 27.474,14.1 29.014,14.1 39.794,14.1 41.334,14.1 61.354,14.1 64.434,14.1 67.514,14.1 70.594,14.1 72.134,14.1 73.674,14.1
GPS_RESET: "GPS CONN.1" U1.1.21 | length 57.9
  Top Layer w0.152: U1.1.21 44.573,37.117 50.186,31.505 89.59,31.505 91.074,30.02 91.074,26.35
GPS_RX: "GPS CONN.6" U1.1.16 | length 55.1
  Top Layer w0.152: U1.1.16 37.75,31.722 38.772,30.7 60.667,30.7 67.9,23.467 88.074,23.467
GPS_SCL: "GPS CONN.3" U1.1.58 | length 101
  Top Layer w0.152: v1(22.494,41.7) 23.516,41.7 27.099,38.117 U1.1.58
  Bottom Layer w0.152: v1(22.494,41.7) 22.49,41.695 22.49,31.795 21.958,31.264 21.958,20.836 26.049,16.745 50.422,16.745 50.8,16.367 58.205,16.367 60.005,18.167 85.862,18.167 86.494,18.8 89.694,18.8 91.074,20.18 91.074,20.35
GPS_SDA: "GPS CONN.7" U1.1.59 | length 95
  Top Layer w0.152: v1(23.458,40.536) 23.65,40.536 26.57,37.617 U1.1.59
  Bottom Layer w0.152: v1(23.458,40.536) 22.794,39.873 22.794,31.6 22.263,31.068 22.263,21.132 26.344,17.05 50.617,17.05 50.995,16.672 58.005,16.672 59.933,18.6 84.094,18.6 85.844,20.35 88.074,20.35
GPS_TX: "GPS CONN.5" U1.1.17 | length 52.7
  Top Layer w0.152: U1.1.17 41.15,35.117 41.695,34.572 41.695,33.299 43.794,31.2 79.394,31.2 84.244,26.35 88.074,26.35
NetC0.1_2: C0.1.2 F0.1.2 L0.1.1 | length 23.9
  Top Layer w0.382: L0.1.1 19.6,11.467 19.3,11.167 ; F0.1.2 25.2,5.267 25.7,5.767 25.7,8.767 25.2,9.267 19.8,9.267 19.3,9.767 19.3,11.167 ; C0.1.2 20.094,15.4 19.294,14.6 19.294,11.873 19.3,11.867 19.3,11.167
NetC0.4_2: C0.4.2 L0.3.2 U0.2.A1 U0.2.A2 | length 13.7
  Top Layer w0.304: C0.4.2@57.377,6.567 C0.4.2 60.994,6.6 61.494,6.1 61.5,6.1 61.5,4.467 ; L0.3.2 61.045,2.567 ; U0.2.A1 62.99,2.567 61.045,2.567 ; U0.2.A2 61.91,4.877 61.5,4.467 ; 61.045,2.567 61.5,3.022 61.5,4.467
NetC1.1_1: C1.1.1 U1.1.5 Y1.1.2 | length 16.9
  Top Layer w0.152: Y1.1.2 30.5,20.267 30.294,20.473 30.294,23.5 32.25,25.456 ; U1.1.5 32.25,25.456 ; C1.1.1 32.594,24.6 32.25,24.944 32.25,25.456
NetC1.2_1: C1.2.1 R1.3.2 Y1.1.1 | length 8.9
  Top Layer w0.152: Y1.1.1 39.9,20.267 41.094,21.462 41.094,24.5 41.294,24.7 ; R1.3.2 41.294,24.7 ; C1.2.1 41.494,24.9 41.294,24.7
NetC1.4_2: C1.4.2 U1.1.3 Y1.2.1 | length 16
  Top Layer w0.152: C1.4.2 25.027,25.267 25.194,25.1 ; Y1.2.1 25.394,22.8 25.194,23 25.194,25.1 ; U1.1.3 31.25,29.356 29.494,27.6 27.094,27.6 25.194,25.7 25.194,25.1
NetC1.5_2: C1.5.2 R1.8.1 Y1.2.2 | length 10.1
  Top Layer w0.152: C1.5.2 29.094,19.8 29.594,20.3 29.594,23 ; Y1.2.2 29.394,22.8 29.594,23 ; R1.8.1 28.194,25.9 27.994,25.7 27.994,24.8 28.394,24.4 29.294,24.4 29.594,24.1 29.594,23
NetC2.12_1: C2.12.1 U1.1.23 U2.2.5 | length 80.9
  Top Layer w0.152: C2.12.1 13.894,67.6 15.544,69.25 ; v1(16.168,53.974) 16.168,54.038 15.59,54.617 15.59,69.25 15.59,71.495 16.294,72.2 17.345,72.2 U2.2.5 ; U1.1.23 50.577,38.117 v1(50.594,38.1)
  Bottom Layer w0.152: v1(16.168,53.974) 16.221,53.974 19.08,51.114 45.28,51.114 52.294,44.1 52.294,39.8 v1(50.594,38.1)
NetC2.13_2: C2.13.2 U1.1.36 U2.1.6 | length 30.6
  Top Layer w0.152: U1.1.36 36.25,47.856 40.294,51.9 47.894,51.9 50.294,54.3 53.854,54.3 55.884,56.33 ; C2.13.2 53.774,56.33 55.884,56.33 ; U2.1.6 55.884,56.33
NetD2.1_1: D2.1.1 R2.7.2 | length 4.7
  Top Layer w0.152: D2.1.1 46.594,54.8 46.894,55.1 46.894,57.7 46.794,57.8 46.794,57.811 46.705,57.9 R2.7.2
NetD2.2_1: D2.2.1 R2.10.2 | length 4.8
  Top Layer w0.152: D2.2.1 46.594,74 46.894,74.3 46.894,76.8 46.694,77 R2.10.2
NetD2.2_2: D2.2.2 R2.8.1 U2.2.15 | length 9.2
  Top Layer w0.152: U2.2.15 41.939,70.244 42.539,70.844 ; R2.8.1 44,70.844 42.539,70.844 ; D2.2.2 43.494,74 42.894,73.4 42.894,71.2 42.539,70.844
NetD2.3_1: D2.3.1 R2.3.2 | length 4.8
  Top Layer w0.152: R2.3.2 97.494,39.5 97.694,39.7 97.694,42.3 97.494,42.5 D2.3.1
NetD2.4_1: D2.4.1 R2.6.2 | length 5.1
  Top Layer w0.152: D2.4.1 93.894,57.3 93.394,57.8 93.394,60.2 93.594,60.4 R2.6.2
NetL0.1_2: L0.1.2 U0.1.A1 U0.1.A2 | length 12.7
  Top Layer w0.382: L0.1.2 27.5,11.467 28.25,10.717 28.25,6.217 ; U0.1.A1 28.78,3.187 28.25,3.717 28.25,6.217 ; U0.1.A2 29.7,5.467 29,5.467 28.25,6.217
NetL0.2_1: L0.2.1 U0.1.A5 U0.1.B5 U0.1.C5 | length 24.5
  Top Layer w0.304: U0.1.A5 29.71,14.177 30.2,14.667 32.95,14.667 ; U0.1.B5 32,13.717 32.95,14.667 ; U0.1.C5 34.29,13.757 35.2,14.667 ; L0.2.1 43.7,15.017 42.417,16.3 36.833,16.3 35.2,14.667 ; 32.95,14.667 35.2,14.667
NetL0.4_1: L0.4.1 U0.2.A5 U0.2.B5 U0.2.C5 | length 27.4
  Top Layer w0.152: U0.2.A5 63.01,13.477 64.688,15.155 66.688,15.155 ; U0.2.B5 65.3,13.767 66,14.467 66.688,15.155 ; U0.2.C5 67.59,12.857 69.888,15.155 ; 69.9,15.155 69.888,15.155 ; L0.4.1 77.1,13.867 75.8,15.167 69.9,15.167 69.888,15.155 ; 66.688,15.155 69.888,15.155
NetQ2.1_1: Q2.1.1 R2.4.2 R2.5.2 | length 11.7
  Top Layer w0.152: R2.4.2 96.344,52.45 96.444,52.35 ; Q2.1.1 96.444,52.35 ; R2.5.2 97.294,45.6 97.594,45.9 97.594,51.8 97.194,52.2 96.594,52.2 96.444,52.35
NetQ2.1_2: Q2.1.2 R2.3.1 | length 17
  Top Layer w0.152: Q2.1.2 94.544,51.65 94.394,51.8 93.794,51.8 91.994,50 91.994,40.2 92.694,39.5 R2.3.1
NetQ2.2_1: Q2.2.1 R2.8.2 R2.9.2 | length 14.1
  Top Layer w0.152: Q2.2.1 45.944,68.445 47.2,69.701 ; R2.8.2 47.111,70.8 47.2,70.711 47.2,69.701 ; R2.9.2 47.111,61.7 47.2,61.789 47.2,69.701
NetQ2.2_2: Q2.2.2 R2.7.1 | length 17.3
  Top Layer w0.152: Q2.2.2 44.044,68.7 43.744,69 42.094,69 41.194,68.1 41.194,58.6 41.894,57.9 R2.7.1
NetR1.1_1: R1.1.1 U1.2.8 | length 3.6
  Top Layer w0.152: R1.1.1 16.294,34.4 16.589,34.105 U1.2.8
NetR1.2_1: R1.2.1 U1.1.28 | length 53.1
  Top Layer w0.152: R1.2.1 v1(18.794,44.8) ; U1.1.28 50.112,40.617 50.894,41.4 v1(50.994,41.4)
  Bottom Layer w0.152: v1(18.794,44.8) 18.994,45 18.994,48.3 20.894,50.2 42.194,50.2 v1(50.994,41.4)
NetR1.3_1: R1.3.1 U1.1.6 | length 13.2
  Top Layer w0.152: U1.1.6 32.75,25.944 33.194,25.5 36.594,25.5 37.394,24.7 R1.3.1
NetR1.4_1: R1.4.1 U1.1.60 | length 12.6
  Top Layer w0.152: R1.4.1 18.794,41.2 20.394,39.6 24.156,39.6 26.639,37.117 U1.1.60
NetR1.8_2: R1.8.2 U1.1.4 | length 8
  Top Layer w0.152: R1.8.2 31.594,25.9 31.75,26.056 U1.1.4
NetR2.1_1: R2.1.1 R2.2.2 U2.1.4 | length 9
  Top Layer w0.152: R2.2.2 54.594,59.4 54.994,59.8 54.994,61.765 55.909,62.68 ; R2.1.1 53.824,62.68 55.909,62.68 ; U2.1.4 55.909,62.68
NetR2.2_1: R2.2.1 U1.1.42 | length 26.5
  Top Layer w0.152: U1.1.42 33.25,45.824 41.126,53.7 46.794,53.7 49.994,56.9 49.994,58.895 50.499,59.4 R2.2.1
NetU1.1_27: U1.1.27 U2.1.7 | length 30.1
  Top Layer w0.152: U1.1.27 53.212,40.117 v1(54.094,41)
  Bottom Layer w0.152: v1(54.094,41) 55.594,42.5 55.594,53.1 56.284,53.79 U2.1.7
NetU1.1_29: U1.1.29 U2.2.3 | length 77.7
  Top Layer w0.152: U1.1.29 49.012,41.117 50.694,42.8 v1(50.694,44)
  Bottom Layer w0.152: U2.2.3 17.36,76.3 17.245,76.184 16.479,76.184 14.994,74.7 14.994,52.179 16.364,50.81 45.154,50.81 50.894,45.069 v1@50.894,44.6
NetU1.1_30: U1.1.30 U2.2.2 | length 78.3
  Top Layer w0.152: U1.1.30 47.812,41.617 48.994,42.8 v1(48.994,44.7)
  Bottom Layer w0.152: U2.2.2 17.367,78.3 16.094,78.3 14.594,76.8 14.594,52 16.09,50.505 45.028,50.505 48.994,46.538 v1(48.994,44.7)
NetU1.1_34: U1.1.34 U2.1.10 | length 24.6
  Top Layer w0.152: U1.1.34 37.25,47.156 38.394,48.3 46.494,48.3 48.624,46.17 U2.1.10
NetU1.1_35: U1.1.35 U2.1.29 | length 98
  Top Layer w0.152: U1.1.35 36.75,47.856 40.394,51.5 v1(50.694,51.5)
  Bottom Layer w0.152: v1(50.694,51.5) 53.063,49.132 53.063,37.132 56.894,33.3 90.894,33.3 91.594,34 91.594,55.4 90.894,56.1 89.974,56.1 U2.1.29
NetU1.1_43: U1.1.43 U2.1.3 | length 38.5
  Top Layer w0.152: U1.1.43 32.75,45.756 40.999,54.005 46.599,54.005 49.69,57.095 49.69,63.995 50.914,65.22 57.954,65.22 57.974,65.2 U2.1.3
NetU1.1_44: U1.1.44 U2.2.6 | length 40.3
  Top Layer w0.152: U2.2.6 15.894,68.743 15.894,55.469 17.463,53.9 25.331,53.9 v1(27.094,52.136) ; v1(31.694,52.1) 32.25,51.544 U1.1.44
  Bottom Layer w0.152: v1(27.094,52.136) 31.658,52.136 v1(31.694,52.1)
NetU1.1_45: U1.1.45 U2.2.9 | length 32.6
  Top Layer w0.152: U2.2.9 16.199,63.028 16.199,55.595 17.59,54.205 28.09,54.205 31.75,50.544 U1.1.45
NetU1.1_50: U1.1.50 U2.2.16 | length 52.7
  Top Layer w0.152: v1(22.394,52.1) 22.394,43.2 23.477,42.117 U1.1.50
  Bottom Layer w0.152: v1@22.694,52.6 24.894,54.8 40.394,54.8 40.894,55.3 40.894,71.9 40.544,72.251 U2.2.16
NRST: C1.3.2 PB1.1 PB1.3 R1.5.1 U1.1.7 | length 48.9
  Top Layer w0.152: U1.1.7 33.25,27.844 34.194,26.9 49.394,26.9 51.294,28.8 52.967,28.8 ; PB1.3 PB1.1 53.6,28.167 52.967,28.8 ; C1.3.2 59.7,25 59.3,25.4 ; R1.5.1 60,21.267 59.3,21.967 59.3,25.4 ; 52.967,28.8 58.267,28.8 59.3,27.767 59.3,25.4
SWDCLK: R1.7.2 SWD.2 U1.1.49 | length 49.1
  Top Layer w0.152: SWD.2 3.804,74.13 6.964,74.13 8.09,73.005 8.09,66.574 9.494,65.169 9.494,61 ; R1.7.2 9.994,60.5 9.494,61 ; v1(21.144,45.45) 19.644,45.45 9.494,55.6 9.494,61 ; v1(23.794,45.6) 23.794,45.505 24.294,45.005 24.294,44.1 25.777,42.617 U1.1.49
  Bottom Layer w0.152: v1(21.144,45.45) 21.294,45.6 v1(23.794,45.6)
SWDIO: R1.6.2 SWD.3 U1.1.46 | length 57
  Top Layer w0.152: SWD.3 3.804,76.67 6.224,76.67 8.394,74.5 8.394,66.7 9.799,65.295 9.799,64.495 ; R1.6.2 10.094,64.2 9.799,64.495 ; v1(20.794,47.6) 20.694,47.7 18.294,47.7 14.194,51.8 14.194,62.1 13.294,63 10.194,63 9.799,63.395 9.799,64.495 ; v1(24.894,48.7) 24.99,48.7 25.49,49.2 30.194,49.2 31.25,48.144 U1.1.46
  Bottom Layer w0.152: v1(20.794,47.6) 22.994,47.6 24.094,48.7 v1(24.894,48.7)
pads on no net: "12V PWR." "GPS CONN." CAN.1 CAN.2 CAN.3 CAN.5 CAN.7 CAN.G1 CAN.G2 M1.1 M2.1 M3.1 M4.1 U0.1.C1 U0.1.D1 U0.1.E1 U0.1.E2 U0.1.E5 U0.2.C1 U0.2.D1 U0.2.E1 U0.2.E2 U0.2.E5 U1.1.2 U1.1.8 U1.1.9 U1.1.10 U1.1.11 U1.1.14 U1.1.15 U1.1.20 U1.1.22 U1.1.24 U1.1.25 U1.1.26 U1.1.33 U1.1.37 U1.1.38 U1.1.39 U1.1.40 U1.1.41 U1.1.51 U1.1.52 U1.1.53 U1.1.54 U1.1.55 U1.1.56 U1.1.57 U1.2.5 U2.1.5 U2.1.8 U2.1.9 U2.1.12 U2.1.14 U2.1.15 U2.1.16 U2.1.17 U2.1.18 U2.1.19 U2.1.20 U2.1.21 U2.1.23 U2.1.24 U2.1.25 U2.1.26 U2.1.30 U2.1.31 U2.1.32 U2.1.33 U2.1.34 U2.1.36 U2.1.37 U2.2.4 U2.2.7 U2.2.8 U2.2.11 U2.2.12 U2.2.13 U2.2.17 U2.2.18 U2.2.19 U2.2.20

## Polygon pours and split planes (outlines as drawn)
3.3V on Top Layer "3.3V_L01_P023" (solid, pour order 23): 0,90 15.894,90 15.894,81.1 18.194,81.1 18.194,75.1 40.394,75.1 40.394,82.7 55.594,82.7 55.594,71.3 59.094,71.3 59.094,66.1 88.494,66.1 88.494,77.7 91.294,77.7 99.992,77.7 99.992,0 75.594,0 75.594,16.4 59.794,16.4 59.794,0 42.394,0 42.394,16.4 26.594,16.4 26.594,0 0,0
no net on Top Layer "NONET_L01_P020" (solid, pour order 20): -0.006,90
GND on Top Layer "GND_L01_P009" (solid, pour order 9): 60.094,0 60.094,16.4 75.894,16.4 75.894,0
GND on Top Layer "GND_L01_P008" (solid, pour order 8): 26.894,0 26.894,16.4 42.694,16.4 42.694,0
GND on Bottom Layer "GND_L02_P021" (solid, pour order 21): -0.006,90 15.894,90 15.894,81.1 18.194,81.1 18.194,75.1 40.394,75.1 40.394,82.7 55.594,82.7 55.594,71.3 59.094,71.3 59.094,66.1 88.494,66.1 88.494,77.7 91.294,77.7 99.994,77.7 99.994,0 -0.006,0

## Silkscreen, mask and mechanical layers (free items; w line width, h text height)
Top Overlay:
  drawing of 2 lines, arcs and shapes, not listed
  text "3.3V" at 5.148,78.754 h1
  text "IO" at 5.148,76.054 h1
  text "CLK" at 5.148,73.554 h1
  text "GND" at 5.148,70.854 h1
  text "3.3V" at 5.148,66.954 h1
  text "GND" at 4.894,61.1 h1
  text "3.3V" at 5.148,57.354 h1
  text "GND" at 5.148,52.054 h1
  text "UBC Solar Brightside / Telemetry Rev 1.0 / Ryan Lee" at 66.694,24.9 h1
  text "12V" at 17.048,14.954 h1
  text "GND" at 17.048,12.354 h1
  text "3.3V" at 79.948,4.154 h1
  text "GND" at 84.548,4.154 h1
  text "5V" at 46.648,3.954 h1
  text "GND" at 48.948,3.954 h1